# Altium PCB Main ESP32_IoT Gateaway.PcbDoc (part 4 of 4)
Units mm, origin at the board's own origin, x right, y up, seen from the top; angles counter-clockwise.
Board outline 125.73 x 73.66 mm, 4 copper layers (Top Layer, GND, Layer 2, Bottom Layer), stack 0.603 mm thick; 167 components, 121 nets, 681 pads, 324 vias.
Unrouted connection lines stored in the file: 132.
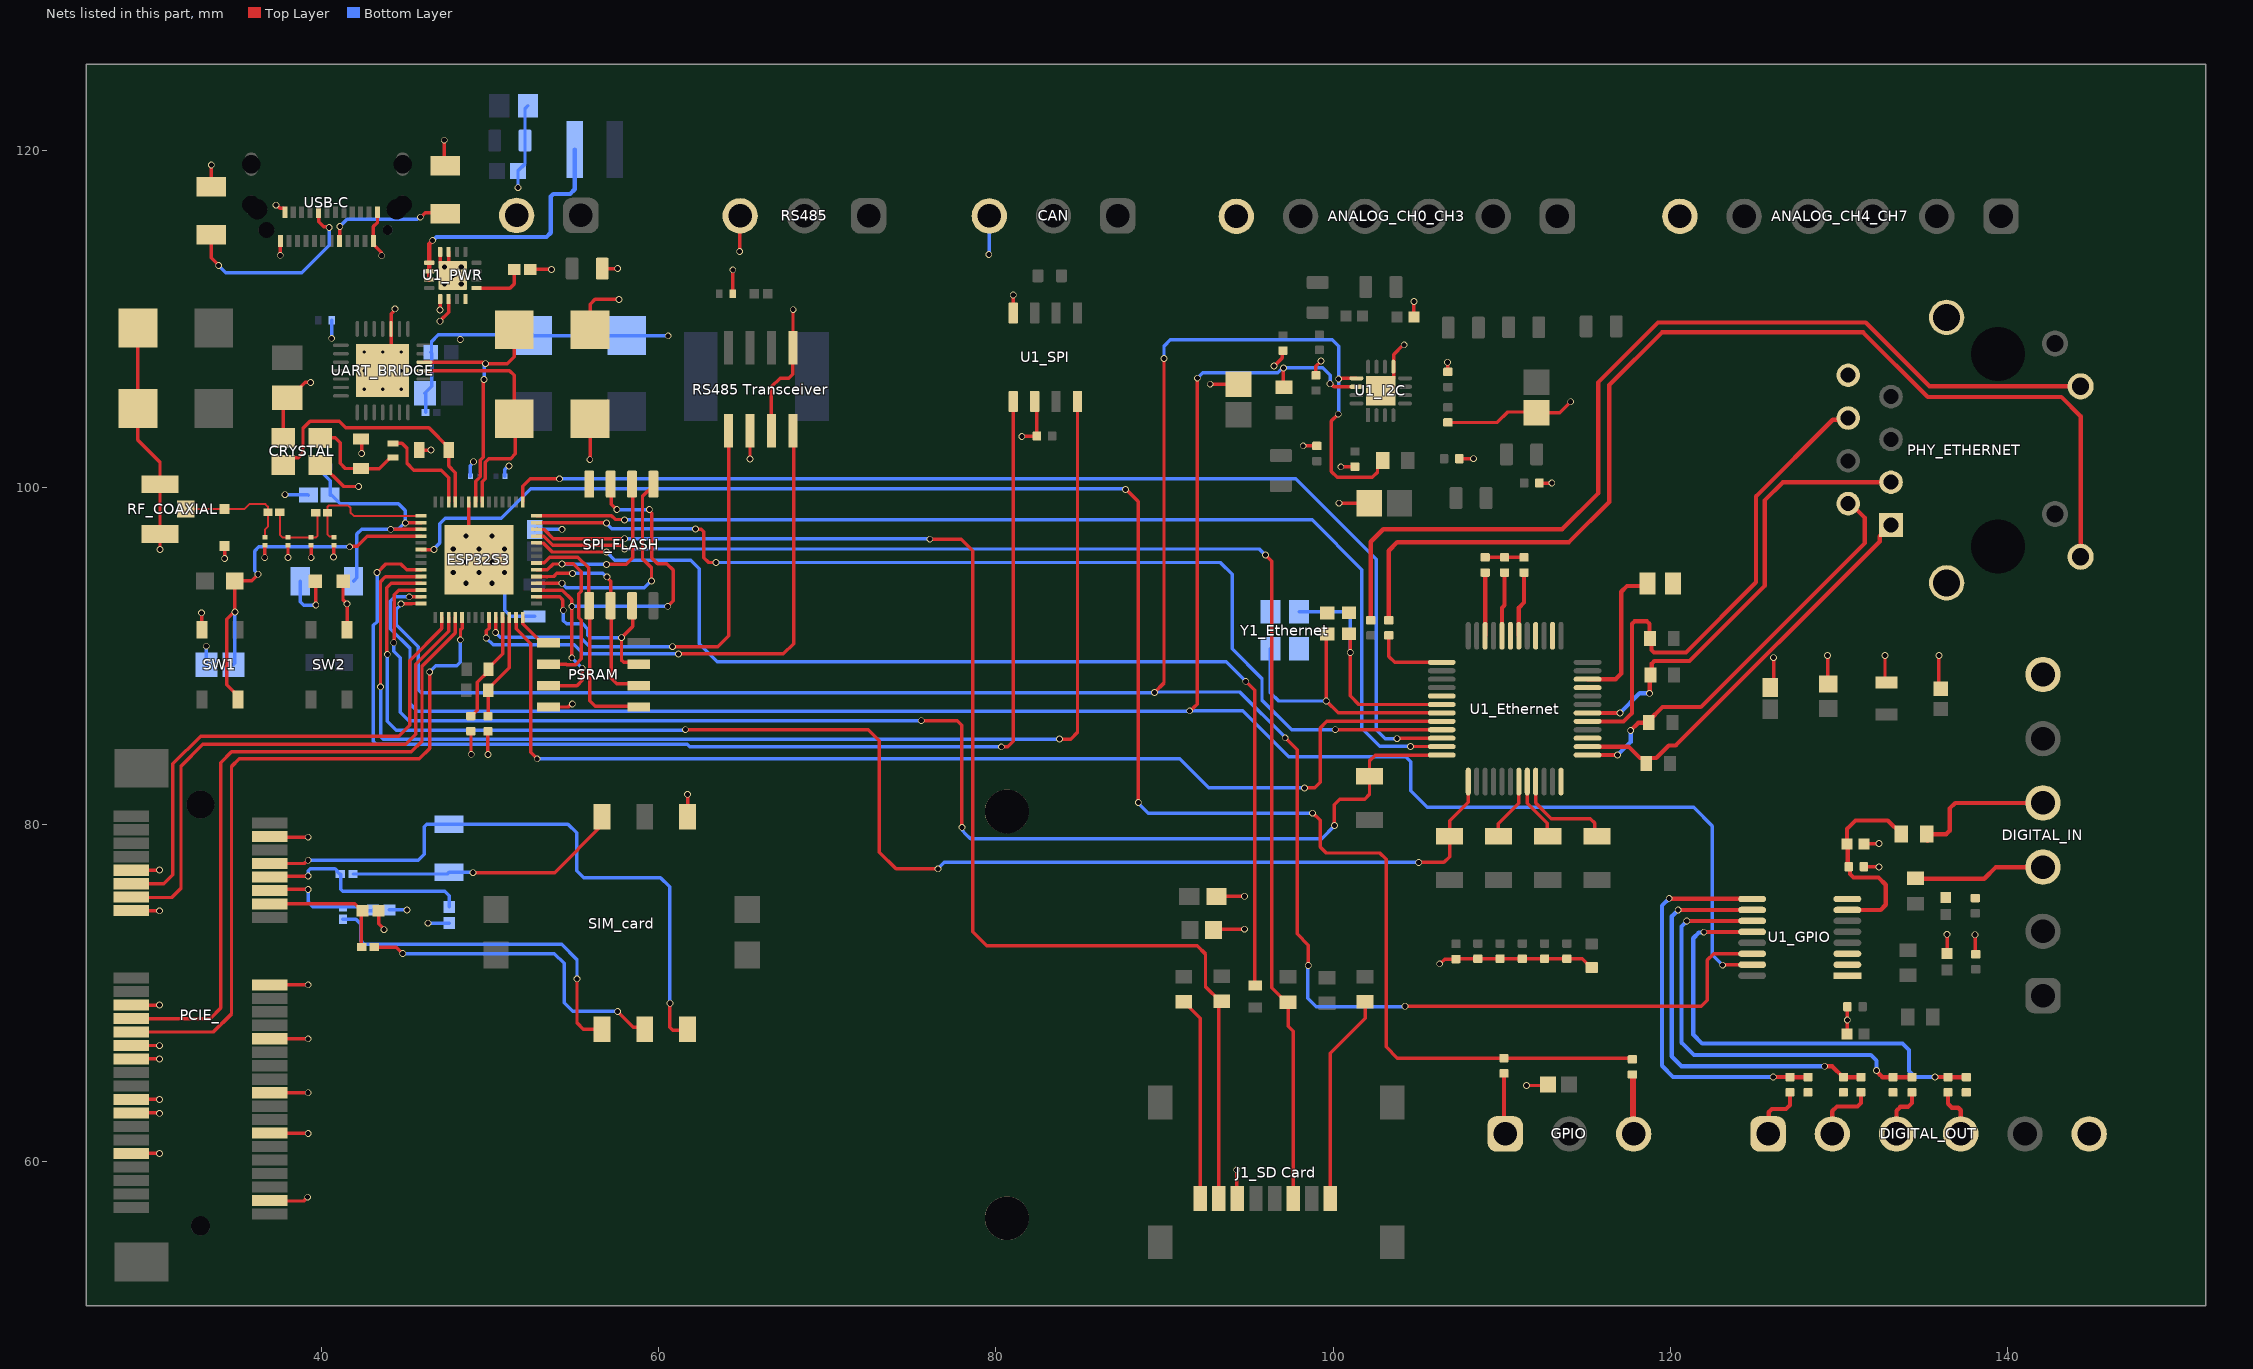
[diagram p5: the nets of this part, all layers, seen from the top]

## Via types
v1: diameter 0.4, hole 0.3, Top Layer to Bottom Layer, 280 vias
v2: diameter 0.5, hole 0.4, Top Layer to Bottom Layer, 18 vias
v3: diameter 0.6, hole 0.3, Top Layer to Bottom Layer, 12 vias
v4: diameter 0.5, hole 0.2, Top Layer to Bottom Layer, 9 vias
v5: diameter 0.5, hole 0.3, Top Layer to Bottom Layer, 5 vias

## Nets (pads, with @x,y where several pads share a name; then routed paths per layer and width w, separated by ;. In a path a pad name is that pad's centre, name@x,y a point inside that pad or via, vN(x,y) a via of type N, cw(c..) or ccw(c..) an arc to the next point about the centre after c; other vN are vias at no path point) (continued)
EXP_DIN3_EXT: DIGITAL_IN.3 R7_GPIO.1 | length 7.9
  Top Layer w0.254: R7_GPIO.1@134.543,76.81 134.569,76.784 138.633,76.784 139.319,77.47 DIGITAL_IN.3@142.113,77.47
EXP_DIN4: C5_GPIO.1 R9_GPIO.2 R10_GPIO.1 U1_GPIO.7 | length 12.5
  Top Layer w0.254: U1_GPIO.7@130.511,74.929 132.486,74.929 132.791,75.235 132.791,76.429 132.359,76.86 130.868,76.86 130.671,77.058 130.671,77.363 130.538,77.495 130.538,78.791 R10_GPIO.1@130.488,78.842 130.488,79.739 130.988,80.239 132.905,80.239 R9_GPIO.2@133.718,79.426
EXP_DIN4_EXT: DIGITAL_IN.4 R9_GPIO.1 | length 8.7
  Top Layer w0.254: R9_GPIO.1@135.218,79.426 136.373,79.426 136.576,79.629 136.576,80.95 136.906,81.28 DIGITAL_IN.4@142.113,81.28 ; R9_GPIO.1@135.262,79.037 R9_GPIO.1@135.414,79.189
EXP_DOUT1: R11_GPIO.1 R12_GPIO.1 U1_GPIO.9 | length 24
  Top Layer w0.254: v1(119.939,75.616) 119.957,75.598 124.842,75.598 U1_GPIO.9@124.86,75.579 ; v1(126.111,65.024) 126.112,65.024 126.118,65.029 126.13,65.017 127.094,65.017 R11_GPIO.1@127.102,65.01 R12_GPIO.1@128.168,65.01
  Bottom Layer w0.254: v1(119.939,75.616) 119.507,75.184 119.507,65.684 120.167,65.024 v1(126.111,65.024)
EXP_DOUT1_EXT: DIGITAL_OUT.1 R11_GPIO.2 | length 3.5
  Top Layer w0.254: DIGITAL_OUT.1@125.806,61.642 125.84,61.676 125.84,62.924 126.032,63.116 126.87,63.116 127.102,63.348 R11_GPIO.2@127.102,64.11
EXP_DOUT2: R13_GPIO.1 R14_GPIO.1 U1_GPIO.10 | length 25
  Top Layer w0.254: v1(120.472,74.93) U1_GPIO.10@124.86,74.929 ; v1(129.162,65.656) 129.605,65.656 130.252,65.01 R14_GPIO.1@130.277,65.01 R13_GPIO.1@131.318,65.01
  Bottom Layer w0.254: v1(120.472,74.93) 120.091,74.549 120.091,66.243 120.675,65.659 129.159,65.659 v1(129.162,65.656)
EXP_DOUT2_EXT: DIGITAL_OUT.2 R13_GPIO.2 | length 3.9
  Top Layer w0.254: DIGITAL_OUT.2@129.616,61.642 129.616,62.992 129.896,63.271 131.115,63.271 131.318,63.475 R13_GPIO.2@131.318,64.11
EXP_DOUT3: R15_GPIO.1 R16_GPIO.1 U1_GPIO.11 | length 26.1
  Top Layer w0.254: v1(120.98,74.27) 121.031,74.27 121.041,74.279 U1_GPIO.11@124.86,74.279 ; v1(132.232,65.405) 132.232,65.365 132.436,65.162 132.436,65.158 132.584,65.01 R16_GPIO.1@133.223,65.01 R15_GPIO.1@134.341,65.01
  Bottom Layer w0.254: v1(120.98,74.27) 120.98,74.251 120.675,73.946 120.675,67.056 121.412,66.319 131.902,66.319 132.232,65.989 v1(132.232,65.405)
EXP_DOUT3_EXT: DIGITAL_OUT.3 R15_GPIO.2 | length 3.1
  Top Layer w0.254: DIGITAL_OUT.3@133.426,61.642 133.426,63.017 133.655,63.246 134.112,63.246 134.341,63.475 R15_GPIO.2@134.341,64.11
EXP_DOUT4: R17_GPIO.1 R18_GPIO.1 U1_GPIO.12 | length 27.4
  Top Layer w0.254: v1(121.996,73.609) 122.006,73.619 124.85,73.619 U1_GPIO.12@124.86,73.629 ; v1(135.712,65.024) 135.719,65.017 136.47,65.017 R17_GPIO.1@136.477,65.01 R18_GPIO.1@137.566,65.01
  Bottom Layer w0.254: v1(121.996,73.609) 121.979,73.592 121.7,73.592 121.361,73.254 121.361,67.539 121.895,67.005 133.782,67.005 134.163,66.624 134.163,65.38 134.518,65.024 v1(135.712,65.024)
EXP_DOUT4_EXT: DIGITAL_OUT.4 R17_GPIO.2 | length 3
  Top Layer w0.254: R17_GPIO.2@136.477,64.11 136.477,63.427 136.709,63.195 137.087,63.195 137.236,63.046 DIGITAL_OUT.4@137.236,61.642
GND: "J1_SD Card.6" "RS485 Transceiver.2" "RS485 Transceiver.3" "RS485 Transceiver.5" ANALOG_CH0_CH3.6 ANALOG_CH4_CH7.6 C1.2 C1_Ethernet.2 C1_GPIO.2 C1_I2C.2 C2.2 C2_CAN.1 C2_Ethernet.1 C2_GPIO.2 C2_I2C.2 C3.2 C3_Ethernet.2 C3_GPIO.2 C3_I2C.2 C4.1 C4_Ethernet.2 C4_GPIO.2 C4_I2C.2 C5.1 C5_Ethernet.1 C5_GPIO.2 C5_I2C.2 C6.1 C6_Ethernet.1 C6_I2C.2 C7.2 C7_Ethernet.1 C7_I2C.2 C7_MAIN_PWR.1 C8.1 C8_Ethernet.1 C8_I2C.2 C8_PWRFLTR.1 C9.2 C9_Ethernet.1 C9_I2C.2 C10.2 C10_Ethernet.1 C10_I2C.2 C11.2 C11_Ethernet.1 C11_I2C.2 C12.2 C13.2 C14.2 C15.2 C16.2 C17.2 C18.2 C19.2 C20.2 C21.2 C22.1 C23.2 C24.2 C_485.2 C_BULK.2 C_USIM.2 C_USIM_CLK.2 C_USIM_RST.2 CAN.3 CAVIN.2 CIN.2 COUT.2 CRYSTAL.2 CRYSTAL.4 CSS.2 D1.2 D2.2 D3.2 D4.2 D5.2 D6.2 D7.2 DIGITAL_IN.6 DIGITAL_OUT.6 ESP32S3.51 ESP32S3.57 GPIO.3 J_PWR.2 pad.3 pad.4 PCIE_.4 PCIE_.9 PCIE_.15 PCIE_.18 PCIE_.21 PCIE_.26 PCIE_.27 PCIE_.29 PCIE_.34 PCIE_.35 PCIE_.37 PCIE_.40 PCIE_.43 PCIE_.50 PHY_ETHERNET.8 PHY_ETHERNET.S1 PHY_ETHERNET.S2 PSRAM.4 PWR_LED.1 R1_TYPEC.2 R2_GPIO.2 R2_TYPEC.2 R3_Ethernet.2 R4_GPIO.2 R6_GPIO.2 R8_GPIO.2 R10_GPIO.2 R12_GPIO.2 R14_GPIO.2 R16_GPIO.2 R18_GPIO.2 R_ADDR_LOW.1 RF_COAXIAL.2 RF_COAXIAL.3 RS485.3 SIM_card.5 SPI_FLASH.4 SW1.2 SW2.4 U1_Ethernet.3 U1_Ethernet.9 U1_Ethernet.14 U1_Ethernet.16 U1_Ethernet.19 U1_Ethernet.29 U1_Ethernet.48 U1_GPIO.1 U1_GPIO.2 U1_GPIO.3 U1_GPIO.8 U1_I2C.9 U1_I2C.17 U1_PWR.5 U1_PWR.6 U1_PWR.8 U1_PWR.15 U1_PWR.16 U1_PWR.17@47.777,112.573 U1_SPI.2 U1_SPI.8 UART_BRIDGE.3 UART_BRIDGE.29 USB-C.A1 USB-C.A12 USB-C.B1 USB-C.B12 Y1_Ethernet.2 Y1_Ethernet.4 | length 202.7
  Top Layer w0.2: U1_PWR.15@47.527,113.973 47.527,112.823 v5(47.777,112.573)
  Top Layer w0.203: PCIE_.43@28.706,60.486 30.344,60.486 v1@30.353,60.477 ; PCIE_.37@28.706,62.886 30.306,62.886 30.328,62.865 v1@30.353,62.865 ; PCIE_.35@28.706,63.686 30.37,63.686 v1(30.378,63.678) ; PCIE_.29@28.706,66.086 28.711,66.091 v1(30.378,66.091) ; PCIE_.27@28.706,66.886 30.345,66.886 v1@30.353,66.878 ; PCIE_.21@28.706,69.286 30.323,69.286 v1@30.328,69.291 ; PCIE_.15@28.706,74.886 30.295,74.886 v1@30.302,74.879 ; PCIE_.9@28.706,77.286 30.169,77.286 30.175,77.292 ; D3.2@29.094,109.449 D4.2@29.094,104.673 29.094,102.809 30.404,101.498 RF_COAXIAL.3@30.404,100.181 RF_COAXIAL.2@30.404,97.231 v1(30.404,96.317) ; v1(32.868,92.558) 32.868,92.532 32.885,92.515 SW1.2@32.885,91.559 ; R1_TYPEC.2@33.452,117.834 v1(33.452,119.126) ; v1(34.239,95.783) D1.2@34.239,96.512 ; v1(36.618,95.825) 36.622,95.83 36.622,96.557 C16.2@36.627,96.562 ; PCIE_.50@36.906,57.686 36.93,57.663 38.943,57.663 v1(39.167,57.887) ; PCIE_.40@36.906,61.686 v1@39.192,61.686 ; PCIE_.34@36.906,64.086 v1@39.192,64.086 ; PCIE_.26@36.906,67.286 v1@39.192,67.286 ; PCIE_.18@36.906,70.486 v1(39.192,70.485) ; PCIE_.4@36.906,79.286 36.944,79.248 v1@39.116,79.248 ; v1(37.287,116.738) 37.34,116.738 37.523,116.555 37.761,116.555 37.81,116.507 USB-C.B1@37.81,116.317 ; v1(37.538,113.763) 37.538,114.595 USB-C.A12@37.56,114.617 ; CRYSTAL.2@37.711,102.933 37.711,105.09 C20.2@37.948,105.327 38.123,105.327 39.019,106.223 v1(39.345,106.223) ; v1(37.998,95.834) C17.2@37.998,96.562 ; v1(39.37,95.825) C18.2@39.37,96.562 ; CRYSTAL.4@39.911,101.333 40.011,101.333 41.294,100.051 v1(42.189,100.051) ; v1(40.703,95.865) 40.703,96.549 C19.2@40.716,96.562 ; PWR_LED.1@41.275,94.45 PWR_LED.1@41.262,94.437 41.262,93.333 v1(41.504,93.091) 41.504,91.567 SW2.4@41.512,91.559 ; C1.2@42.342,102.856 42.367,102.831 v1(42.367,102.006) ; USB-C.B12@43.31,116.317 43.31,115.725 43.06,115.475 43.06,114.417 43.523,113.954 43.523,113.779 v1(43.561,113.741) ; C_USIM_RST.2@43.379,74.879 43.379,74.121 43.688,73.812 v1(43.688,73.762) ; v4(43.612,106.926) 44.112,107.426 UART_BRIDGE.3@44.112,109.401 44.112,110.302 44.346,110.536 v1(44.346,110.59) ; C2.2@45.785,102.21 v1(46.482,102.21) ; v1(47.015,109.855) 47.015,109.88 47.525,110.39 47.525,111.171 U1_PWR.6@47.527,111.173 ; v1(47.019,110.519) 47.023,110.523 47.023,111.169 U1_PWR.5@47.027,111.173 ; U1_PWR.16@47.027,113.973 47.027,113.323 v5(47.277,113.073) ; v1(47.269,120.599) 47.269,119.13 R2_TYPEC.2@47.32,119.079 ; v3(48.565,97.104) 48.727,97.266 ESP32S3.51@48.727,99.132 ; C3.2@48.844,85.533 48.857,85.52 48.857,84.174 v1(48.87,84.161) ; v1(49.86,84.15) C4.1@49.86,85.522 ; CSS.2@52.375,112.928 v1(53.626,112.928) ; PSRAM.4@53.461,86.97 54.633,86.97 54.811,87.147 v1(54.864,87.147) ; v1(55.905,101.642) 55.905,101.668 55.92,101.683 D5.2@55.92,104.064 ; D6.2@55.92,109.347 55.92,110.86 56.21,111.15 v1(57.633,111.15) ; COUT.2@56.643,112.979 v1(57.556,112.979) ; v1(61.697,81.788) 61.697,81.686 61.703,81.68 SIM_card.5@61.703,80.451 ; C_485.2@64.383,111.481 64.383,112.297 64.389,112.303 v1(64.389,112.903) ; v1(64.795,113.995) 64.808,114.008 64.808,116.094 RS485.3@64.821,116.107 ; v1(65.405,101.684) 65.405,103.351 ; 66.675,103.351 66.675,105.96 67.192,106.477 67.716,106.477 67.945,106.705 67.945,108.281 67.958,108.294 67.958,110.528 v1(67.97,110.541) ; U1_SPI.8@81.026,110.346 v1(81.026,111.404) ; v1(81.534,103.022) 81.547,103.035 82.418,103.035 C2_CAN.1@82.43,103.048 82.43,104.962 U1_SPI.2@82.296,105.096 ; v1(92.71,106.121) 94.373,106.121 C2_I2C.2@94.386,106.108 ; C7.2@92.902,73.736 92.953,73.787 v1(94.742,73.787) ; C8.1@93.08,75.717 93.105,75.743 v1(94.742,75.743) ; v1(94.285,59.512) 94.285,57.851 94.326,57.81 ; v1(96.495,107.193) 96.976,107.674 96.976,108.057 C5_I2C.2@97.028,108.11 ; v1(98.222,102.464) 98.229,102.456 C8_I2C.2@99.035,102.456 ; C4_I2C.2@98.984,106.647 98.971,106.66 98.971,107.175 v1(99.289,107.493) ; v1(100.355,99.06) C1_I2C.2@102.135,99.06 ; v1(100.457,101.219) 100.464,101.226 C6_I2C.2@101.295,101.226 ; U1_I2C.17@102.826,105.719 103.588,106.481 103.588,107.881 104.165,108.458 v1(104.216,108.458) ; R_ADDR_LOW.1@104.792,110.109 104.792,110.863 104.8,110.871 v1(104.8,111.023) ; v1(106.324,71.73) 106.611,72.016 C8_PWRFLTR.1@107.29,72.016 107.299,72.025 108.577,72.025 C8_Ethernet.1@108.586,72.034 C11_Ethernet.1@109.906,72.034 C7_Ethernet.1@111.227,72.034 C6_Ethernet.1@112.547,72.034 C9_Ethernet.1@113.867,72.034 114.773,72.034 115.292,71.516 C10_Ethernet.1@115.341,71.516 ; v1(106.782,107.423) 106.794,107.411 106.794,106.863 C11_I2C.2@106.807,106.851 ; C10_I2C.2@106.807,103.85 109.742,103.85 110.363,104.47 112.028,104.47 C3_I2C.2@112.065,104.433 ; C7_I2C.2@107.486,101.702 v1(108.331,101.702) ; C5_Ethernet.1@109.02,95.845 C4_Ethernet.2@110.174,95.845 C3_Ethernet.2@111.328,95.845 ; v1(111.481,64.516) 112.684,64.516 C1_GPIO.2@112.735,64.567 ; C3_I2C.2@112.091,104.433 113.45,104.433 v1(114.097,105.08) ; C9_I2C.2@112.235,100.254 v1(112.979,100.254) ; C6.1@125.933,88.118 126.134,88.318 v1(126.134,89.893) ; v1(129.337,90.018) 129.337,88.38 C5.1@129.388,88.33 ; R4_GPIO.2@130.488,67.564 130.505,67.581 v1(130.505,68.402) 130.509,68.406 130.509,69.186 C2_GPIO.2@130.512,69.19 ; C5_GPIO.2@131.489,77.495 131.501,77.483 132.372,77.483 v1(132.385,77.47) ; R10_GPIO.2@131.488,78.842 131.513,78.867 v1(132.385,78.867) ; v1(132.74,90.018) 132.74,88.519 C9.2@132.842,88.417 ; v1(135.941,90.018) 135.941,88.155 C10.2@136.042,88.053 ; R6_GPIO.2@136.423,72.357 v1(136.423,73.482) ; v1(138.074,73.457) 138.1,73.431 138.1,72.332 C3_GPIO.2@138.125,72.307
  Top Layer w0.35: R2_GPIO.2@117.754,65.165 117.793,65.127 117.793,61.68 GPIO.3@117.831,61.642
  Bottom Layer w0.203: v1(33.147,90.576) 33.16,90.564 C13.2@33.16,89.484 ; v1(37.821,99.568) 39.187,99.568 C7_MAIN_PWR.1@39.212,99.543 ; v1(40.589,108.839) C21.2@40.59,109.911 ; C_USIM_CLK.2@44.01,74.93 v1(45.06,74.93) ; C22.1@46.16,104.451 46.16,105.556 C23.2@46.122,105.594 46.533,106.005 46.533,107.967 C24.2@46.474,108.026 46.513,108.065 46.513,108.641 46.914,109.042 48.216,109.042 ; v1(46.304,74.143) 46.308,74.147 C_USIM.2@47.574,74.147 ; v1(48.216,108.77) 48.216,109.042 ; C14.2@48.814,100.665 48.819,100.67 48.819,101.281 49.002,101.465 v1(49.002,101.518) ; v3(50.851,94.945) 50.851,92.71 51.217,92.344 C12.2@52.629,92.344 ; C15.2@50.868,100.665 50.868,101.058 51.079,101.27 v1(51.105,101.27) ; v1(51.638,117.78) 51.644,117.785 CAVIN.2@51.644,118.77 52.057,119.183 C_BULK.2@52.057,120.574 52.057,122.454 CIN.2@52.234,122.631 ; C11.2@52.629,97.491 52.649,97.511 v1(54.26,97.511) ; v1(60.554,108.991) 60.539,109.006 D7.2@58.09,109.006 D2.2@52.523,109.006 52.487,109.042 48.216,109.042 ; v1(79.578,113.817) 79.591,113.83 79.591,116.091 CAN.3@79.604,116.103
  other v1: 30.378,60.477 39.192,61.671 30.378,62.865 39.192,64.084 30.378,66.878 39.192,67.285 30.378,69.291 30.378,74.879 30.378,77.292 39.192,79.248
  other v3: 48.565,94.31 50.089,94.31 47.803,94.945 49.327,94.945 48.565,95.58 50.089,95.58 47.803,96.342 49.327,96.342 50.851,96.342 50.089,97.104
  other v4: 42.512,105.826 43.612,105.826 44.712,105.826 42.512,106.926 44.712,106.926 42.512,108.026 43.612,108.026 44.712,108.026
  other v5: 47.277,112.073 48.277,112.073 48.277,113.073
GPIO1_EXT: GPIO.1 R1_GPIO.2 | length 3.6
  Top Layer w0.254: R1_GPIO.2@110.134,65.234 110.134,61.718 GPIO.1@110.211,61.642
I2C_SCL: ESP32S3.14 R5_I2C.2 U1_GPIO.14 U1_I2C.13 | length 148.9
  Top Layer w0.203: v1(44.704,93.091) 45.345,93.091 45.361,93.107 ESP32S3.14@45.902,93.107 ; v1(89.408,87.833) 89.967,88.392 v1(89.967,107.645) ; v1(97.155,85.141) 97.866,84.43 97.866,73.508 98.527,72.847 v1(98.527,71.628) ; v1(100.305,104.343) 99.898,103.937 99.898,100.94 100.235,100.602 102.33,100.602 102.634,100.907 102.634,101.302 R5_I2C.2@102.933,101.6 ; v1(100.33,106.426) 100.366,106.462 101.379,106.462 U1_I2C.13@101.386,106.469 ; v1(104.267,69.215) 121.844,69.215 122.199,69.571 122.199,71.958 122.571,72.329 U1_GPIO.14@124.86,72.329
  Bottom Layer w0.203: v1(44.704,93.091) 44.704,93.038 44.425,92.758 44.425,91.846 45.72,90.551 45.72,87.986 45.898,87.808 89.383,87.808 89.433,87.859 94.463,87.859 97.155,85.166 v1(97.155,85.141) ; v1(89.967,107.645) 89.967,108.382 90.348,108.763 99.949,108.763 100.33,108.382 v1(100.33,106.426) 100.33,104.369 v1(100.305,104.343) ; v1(98.527,71.628) 98.501,71.603 98.501,69.698 99.009,69.19 104.216,69.19 104.242,69.215 v1(104.267,69.215)
I2C_SDA: ESP32S3.13 R4_I2C.2 U1_GPIO.15 U1_I2C.14 | length 131.7
  Top Layer w0.203: v1@45.192,93.506 ESP32S3.13@45.901,93.506 ; v1(91.491,86.741) 91.544,86.741 91.801,86.998 91.804,86.998 91.948,87.141 v1(91.948,106.477) ; v1(97.053,107.086) 97.053,105.957 R4_I2C.2@97.079,105.931 ; v1(99.822,106.147) 99.875,106.147 100.053,105.969 U1_I2C.14@101.386,105.969 ; v1(123.114,71.653) 123.14,71.679 U1_GPIO.15@124.86,71.679
  Bottom Layer w0.203: v1(45.191,93.506) 44.331,93.506 44.069,93.243 44.069,91.618 45.237,90.449 45.237,87.147 45.669,86.716 91.465,86.716 v1(91.491,86.741) 94.64,86.741 97.358,84.023 104.318,84.023 104.616,83.725 104.616,81.998 105.588,81.026 121.387,81.026 122.504,79.908 122.504,72.263 v1(123.114,71.653) ; v1(91.948,106.477) 92.262,106.791 96.705,106.791 97,107.086 v1(97.053,107.086) 99.39,107.086 99.822,106.655 v1(99.822,106.147)
LINKLED: R11_Ethernet.2 U1_Ethernet.25 | length 4.5
  Top Layer w0.203: R11_Ethernet.2@103.302,91.219 103.302,89.967 103.651,89.618 U1_Ethernet.25@106.444,89.618
NetC1_1: C1.1 CRYSTAL.1 L1.1 | length 6.1
  Top Layer w0.203: CRYSTAL.1@39.911,102.933 40.805,102.933 41.097,102.641 41.097,101.422 41.402,101.117 42.18,101.117 42.192,101.106 43.418,101.106 44.071,101.759 L1.1@44.221,101.759
NetC1_Ethernet_1: C1_Ethernet.1 U1_Ethernet.30 Y1_Ethernet.1 | length 14.6
  Top Layer w0.203: C1_Ethernet.1@100.94,91.313 101.016,91.237 101.016,87.63 101.528,87.118 U1_Ethernet.30@106.444,87.118
  Bottom Layer w0.203: Y1_Ethernet.1@97.98,92.616 100.678,92.616 101.016,92.278 v1(101.016,90.195)
NetC2_Ethernet_2: C2_Ethernet.2 U1_Ethernet.31 Y1_Ethernet.3 | length 17.3
  Top Layer w0.203: C2_Ethernet.2@99.644,91.298 99.593,91.247 v1(99.593,87.325) 100.301,86.618 U1_Ethernet.31@106.444,86.618
  Bottom Layer w0.203: Y1_Ethernet.3@96.28,90.416 96.28,87.82 96.774,87.325 v1(99.593,87.325)
NetC3_Ethernet_1: C3_Ethernet.1 U1_Ethernet.18 | length 3.9
  Top Layer w0.254: U1_Ethernet.18@111.019,91.193 111.019,92.858 111.328,93.167 C3_Ethernet.1@111.328,94.945
NetC4_Ethernet_1: C4_Ethernet.1 U1_Ethernet.20 | length 3.8
  Top Layer w0.254: U1_Ethernet.20@110.019,91.193 110.019,92.849 110.174,93.004 C4_Ethernet.1@110.174,94.945
NetC5_Ethernet_2: C5_Ethernet.2 U1_Ethernet.22 | length 3.8
  Top Layer w0.254: U1_Ethernet.22@109.019,91.193 C5_Ethernet.2@109.02,94.945
NetC16_1: C16.1 D1.1 L3.1 RF_COAXIAL.1 | length 7
  Top Layer w0.116: RF_COAXIAL.1@31.929,98.706 31.935,98.712 D1.1@34.239,98.712 35.415,98.712 35.712,99.009 36.652,99.009 36.8,98.862 36.8,98.534 L3.1@36.81,98.524 36.81,97.668 36.627,97.485 C16.1@36.627,97.037
NetC17_1: C17.1 C18.1 L3.2 L4.1 | length 5.1
  Top Layer w0.116: L3.2@37.518,98.524 37.518,97.178 37.659,97.037 C17.1@37.998,97.037 C18.1@39.37,97.037 39.658,97.037 39.751,97.13 39.751,98.374 L4.1@39.634,98.491
NetCSS_1: CSS.1 U1_PWR.9 | length 3.2
  Top Layer w0.203: U1_PWR.9@49.177,111.823 51.168,111.823 51.41,112.065 51.41,112.916 CSS.1@51.422,112.928
NetESP32S3_6: ESP32S3.6 R1_GPIO.1 R2_GPIO.1 | length 106
  Top Layer w0.203: ESP32S3.6@45.902,96.307 46.65,96.307 v1(46.66,96.317) ; v1(87.681,99.873) 87.732,99.873 88.443,99.162 v1(88.443,81.305) ; v1(98.781,80.67) 98.806,80.67 99.238,80.239 99.238,78.664 99.593,78.308 102.768,78.308 103.149,77.927 103.149,66.802 103.817,66.134 R1_GPIO.1@110.134,66.134 117.685,66.134 R2_GPIO.1@117.754,66.065
  Bottom Layer w0.203: v1(46.66,96.317) 46.66,96.37 46.99,96.7 46.99,97.841 47.32,98.171 50.648,98.171 52.4,99.924 87.491,99.924 87.504,99.91 87.643,99.91 v1(87.681,99.873) ; v1(88.443,81.305) 88.443,81.255 89.027,80.67 v1(98.781,80.67)
NetESP32S3_9: ESP32S3.9 U1_SPI.1 | length 71.5
  Top Layer w0.203: v1(43.282,94.945) 43.79,95.453 44.698,95.453 45.044,95.107 ESP32S3.9@45.902,95.107 ; v1(80.315,84.607) 80.696,84.607 81.026,84.938 U1_SPI.1@81.026,105.096
  Bottom Layer w0.203: v1(43.282,94.945) 43.282,92.037 43.053,91.808 43.053,84.938 43.236,84.755 61.675,84.755 61.822,84.607 v1(80.315,84.607)
NetESP32S3_10: ESP32S3.10 U1_SPI.4 | length 72.9
  Top Layer w0.203: v1(43.49,88.163) 43.485,88.168 43.485,94.412 43.78,94.707 ESP32S3.10@45.902,94.707 ; v1(83.769,85.065) 84.43,85.065 84.836,85.471 U1_SPI.4@84.836,105.096
  Bottom Layer w0.203: v1(43.49,88.163) 43.51,88.143 43.51,85.192 43.637,85.065 v1(83.769,85.065)
NetESP32S3_11: ESP32S3.11 R1_Ethernet.1 U1_Ethernet.37 | length 85.8
  Top Layer w0.203: v1(43.891,90.094) 43.866,90.119 43.866,94.056 44.117,94.307 ESP32S3.11@45.902,94.307 ; v1(61.57,85.623) 72.415,85.623 73.076,84.963 73.076,78.359 74.066,77.368 v1(76.556,77.368) ; v1(105.08,77.749) 106.578,77.749 106.909,78.08 R1_Ethernet.1@106.909,79.304 106.909,80.213 108.019,81.324 U1_Ethernet.37@108.019,82.543
  Bottom Layer w0.203: v1(43.891,90.094) 43.891,86.131 44.425,85.598 61.544,85.598 v1(61.57,85.623) ; v1(76.556,77.368) 76.937,77.749 v1(105.08,77.749)
NetESP32S3_12: ESP32S3.12 R2_Ethernet.1 U1_Ethernet.36 | length 81.4
  Top Layer w0.203: v1(44.272,90.78) 44.298,90.805 44.298,93.624 44.58,93.907 ESP32S3.12@45.902,93.907 ; v1(75.565,86.157) 77.699,86.157 77.978,85.877 v1(77.978,79.832) ; v1(100.076,79.934) 100.076,81.178 100.393,81.496 101.867,81.496 102.159,81.788 R2_Ethernet.1@102.159,82.86 102.159,83.769 102.508,84.118 U1_Ethernet.36@106.444,84.118
  Bottom Layer w0.203: v1(44.272,90.78) 44.272,90.272 44.653,89.891 44.653,86.665 45.164,86.154 75.562,86.154 v1(75.565,86.157) ; v1(77.978,79.832) 78.016,79.795 78.016,79.621 78.176,79.46 78.49,79.146 99.314,79.146 100.076,79.908 v1(100.076,79.934)
NetESP32S3_16: ESP32S3.16 PCIE_.11 | length 31.4
  Top Layer w0.203: PCIE_.11@28.706,76.486 30.639,76.486 31.166,77.013 31.166,83.591 32.817,85.242 44.577,85.242 45.212,85.877 45.212,89.713 47.127,91.628 ESP32S3.16@47.127,92.282
NetESP32S3_17: ESP32S3.17 PCIE_.13 | length 32.9
  Top Layer w0.203: PCIE_.13@28.706,75.686 28.726,75.667 31.09,75.667 31.648,76.225 31.648,83.464 32.944,84.76 44.983,84.76 45.568,85.344 45.568,89.51 47.527,91.469 ESP32S3.17@47.527,92.282
NetESP32S3_18: ESP32S3.18 PCIE_.23 | length 40.7
  Top Layer w0.203: PCIE_.23@28.706,68.486 33.383,68.486 34.011,69.113 34.011,83.668 34.646,84.303 45.314,84.303 45.949,84.938 45.949,89.383 47.927,91.361 ESP32S3.18@47.927,92.282
NetESP32S3_19: ESP32S3.19 PCIE_.25 | length 42.6
  Top Layer w0.203: PCIE_.25@28.706,67.686 33.574,67.686 34.646,68.758 34.646,83.439 35.103,83.896 45.796,83.896 46.406,84.506 v1(46.406,89.052) ; v1(48.222,90.954) 48.23,90.962 48.23,91.556 48.327,91.652 ESP32S3.19@48.327,92.282
  Bottom Layer w0.203: v1(46.406,89.052) 46.408,89.052 46.764,89.408 48.006,89.408 48.222,89.624 v1(48.222,90.954)
NetESP32S3_23: "RS485 Transceiver.4" ESP32S3.23 | length 32.8
  Top Layer w0.203: v1(49.759,91.059) 49.759,91.484 49.927,91.652 ESP32S3.23@49.927,92.282 ; v1(61.163,90.119) 67.386,90.119 67.996,90.729 67.996,103.301 67.945,103.351
  Bottom Layer w0.203: v1(49.759,91.059) 50.165,90.653 54.991,90.653 55.524,90.119 v1(61.163,90.119)
NetESP32S3_24: "RS485 Transceiver.1" ESP32S3.24 | length 27.5
  Top Layer w0.203: v1(50.317,91.389) 50.317,91.415 50.327,91.424 ESP32S3.24@50.327,92.282 ; v1(60.808,90.551) 63.5,90.551 64.135,91.186 64.135,103.351
  Bottom Layer w0.203: v1(50.317,91.389) 50.597,91.11 55.347,91.11 55.905,90.551 v1(60.808,90.551)
NetESP32S3_27: ESP32S3.27 U1_Ethernet.32 | length 66.8
  Top Layer w0.203: ESP32S3.27@51.527,92.282 51.527,91.602 52.4,90.729 52.4,84.277 v1(52.781,83.896) ; v1(98.298,82.169) 98.908,82.169 99.238,82.499 99.238,85.725 99.631,86.118 U1_Ethernet.32@106.444,86.118
  Bottom Layer w0.203: v1(52.781,83.896) 90.907,83.896 92.634,82.169 v1(98.298,82.169)
NetESP32S3_38: ESP32S3.38 R8.1 | length 66.4
  Top Layer w0.203: ESP32S3.38@52.752,96.707 52.76,96.699 53.139,96.699 53.673,96.164 v1(56.896,96.164) ; v1(94.818,88.494) 95.352,87.96 95.352,70.475 R8.1@95.377,70.449
  Bottom Layer w0.203: v1(56.896,96.164) 57.377,95.683 61.898,95.683 62.408,95.174 62.408,90.721 63.467,89.662 93.65,89.662 v1(94.818,88.494)
NetESP32S3_39: "J1_SD Card.3" ESP32S3.39 R5.1 | length 82.6
  Top Layer w0.203: ESP32S3.39@52.752,97.107 52.76,97.099 53.168,97.099 53.696,96.571 57.734,96.571 v1(57.963,96.342) ; v1(95.987,95.987) 96.368,95.606 96.368,70.321 97.233,69.456 R5.1@97.333,69.456 97.333,68.021 97.626,67.728 97.626,57.81
  Bottom Layer w0.203: v1(57.963,96.342) 95.628,96.342 95.984,95.987 v1(95.987,95.987)
NetESP32S3_40: "J1_SD Card.7" ESP32S3.40 R7.2 | length 78.4
  Top Layer w0.203: ESP32S3.40@52.752,97.507 52.76,97.499 53.196,97.499 53.743,96.952 v1(57.963,96.952) ; v1(76.073,96.926) 77.927,96.926 78.613,96.241 78.613,73.635 79.451,72.796 91.948,72.796 92.431,72.314 92.431,70.372 93.296,69.506 R7.2@93.396,69.506 93.226,69.336 93.226,57.81
  Bottom Layer w0.203: v1(57.963,96.952) 57.975,96.939 76.06,96.939 v1(76.073,96.926)
NetESP32S3_41: ESP32S3.41 U1_Ethernet.33 | length 63
  Top Layer w0.203: ESP32S3.41@52.752,97.907 53.453,97.907 53.458,97.912 56.825,97.912 v1@56.845,97.892 ; v1(62.179,97.536) 62.205,97.511 62.509,97.511 62.662,97.358 62.662,95.834 62.955,95.541 v1(63.386,95.541) ; v1(100.127,85.623) 100.132,85.618 U1_Ethernet.33@106.444,85.618
  Bottom Layer w0.203: v1@56.845,97.892 56.848,97.892 57.203,97.536 v1(62.179,97.536) ; v1(63.386,95.541) 93.308,95.541 94.005,94.844 94.005,90.424 95.783,88.646 95.783,87.376 97.536,85.623 v1(100.127,85.623)
  other v1: 56.896,97.892
NetESP32S3_42: ESP32S3.42 U1_Ethernet.35 | length 64.9
  Top Layer w0.203: ESP32S3.42@52.752,98.307 57.192,98.307 57.404,98.095 57.937,98.095 v1(57.963,98.069) ; v1(104.597,84.633) 104.605,84.625 106.437,84.625 U1_Ethernet.35@106.444,84.618
  Bottom Layer w0.203: v1(57.963,98.069) 98.755,98.069 101.702,95.123 101.702,85.7 102.768,84.633 v1(104.597,84.633)
NetESP32S3_43: ESP32S3.43 U1_Ethernet.34 | length 68
  Top Layer w0.203: ESP32S3.43@51.927,99.132 51.927,100.06 52.375,100.508 v1(54.102,100.508) ; v1(103.784,85.09) 103.798,85.104 106.43,85.104 U1_Ethernet.34@106.444,85.118
  Bottom Layer w0.203: v1(54.102,100.508) 97.79,100.508 102.565,95.733 102.565,85.623 103.099,85.09 v1(103.784,85.09)
NetJ1_Ethernet_9: PHY_ETHERNET.9 R11_Ethernet.1 | length 65
  Top Layer w0.254: R11_Ethernet.1@103.302,92.119 103.302,96.241 103.81,96.749 113.995,96.749 116.383,99.136 116.383,106.07 119.507,109.195 131.445,109.195 135.28,105.359 143.205,105.359 144.348,104.216 PHY_ETHERNET.9@144.348,95.884
NetJ1_Ethernet_11: PHY_ETHERNET.11 R12_Ethernet.1 | length 57.6
  Top Layer w0.254: R12_Ethernet.1@102.235,92.119 102.235,96.774 102.972,97.511 113.589,97.511 115.722,99.644 115.722,106.223 119.278,109.779 131.597,109.779 135.382,105.994 PHY_ETHERNET.11@144.348,105.994
"NetJ1_SD Card_1": "J1_SD Card.1" R3.2 | length 12.5
  Top Layer w0.203: 99.826,57.81 99.826,66.425 101.898,68.497 R3.2@101.898,69.47
"NetJ1_SD Card_8": "J1_SD Card.8" R6.2 | length 12.1
  Top Layer w0.203: R6.2@91.142,69.478 92.126,68.494 92.126,57.81
NetPWR_LED_2: PWR_LED.2 R_PWR.2 | length 3.7
  Top Layer w0.203: PWR_LED.2@39.612,94.437 39.649,94.4 v1(39.649,93.015)
  Bottom Layer w0.203: R_PWR.2@38.735,94.437 38.735,93.218 38.938,93.015 v1(39.649,93.015)
NetR1_TYPEC_1: R1_TYPEC.1 USB-C.B5 | length 11.8
  Top Layer w0.203: R1_TYPEC.1@33.452,114.982 33.452,113.614 33.884,113.182 v1(33.884,113.157) ; USB-C.B5@39.81,116.317 39.81,115.765 40.116,115.459 40.405,115.459 v1(40.442,115.421)
  Bottom Layer w0.203: v1(33.884,113.157) 34.315,112.725 38.809,112.725 40.437,114.353 40.437,115.416 v1(40.442,115.421)
NetR2_TYPEC_1: R2_TYPEC.1 USB-C.A5 | length 7.5
  Top Layer w0.203: USB-C.A5@41.06,114.617 41.066,114.623 41.066,115.462 v1(41.072,115.468) ; v1(45.847,116.027) 45.882,116.027 46.136,116.281 47.266,116.281 R2_TYPEC.1@47.32,116.227
  Bottom Layer w0.203: v1(41.072,115.468) 41.072,115.474 41.498,115.9 43.79,115.9 ; 43.791,115.899 45.666,115.899 45.794,116.027 v1(45.847,116.027)
NetR3_Ethernet_1: R3_Ethernet.1 U1_Ethernet.10 | length 8.7
  Top Layer w0.254: U1_Ethernet.10@115.094,88.618 116.761,88.618 117.094,88.951 117.094,93.802 117.436,94.144 118.514,94.144 R3_Ethernet.1@118.654,94.285
NetR4_Ethernet_2: R4_Ethernet.2 U1_Ethernet.45 | length 6.1
  Top Layer w0.203: U1_Ethernet.45@112.019,82.543 112.019,81.275 112.954,80.34 115.265,80.34 115.519,80.086 115.519,79.431 R4_Ethernet.2@115.646,79.304
NetR5_Ethernet_2: R5_Ethernet.2 U1_Ethernet.44 | length 3.7
  Top Layer w0.203: U1_Ethernet.44@111.519,82.543 111.519,81.267 112.716,80.07 112.716,79.322 R5_Ethernet.2@112.734,79.304
NetR6_Ethernet_2: R6_Ethernet.2 U1_Ethernet.43 | length 3.7
  Top Layer w0.203: R6_Ethernet.2@109.821,79.304 109.804,79.321 109.804,80.035 111.015,81.246 111.015,82.539 U1_Ethernet.43@111.019,82.543
NetR_SIM_CLK_2: R_SIM_CLK.2 SIM_card.2 | length 19.4
  Top Layer w0.203: R_SIM_CLK.2@43.124,72.72 44.425,72.72 v1(44.806,72.339) ; v1(57.556,68.91) 57.556,68.885 58.477,67.964 59.05,67.964 SIM_card.2@59.163,67.851
  Bottom Layer w0.203: v1(44.806,72.339) 53.797,72.339 54.381,71.755 54.381,69.418 54.889,68.91 v1(57.556,68.91)
NetR_SIM_PU_1: R_SIM_PU.1 RSIM.1 SIM_card.7 | length 16.2
  Top Layer w0.203: v1(48.977,77.14) 53.811,77.14 56.623,79.951 SIM_card.7@56.623,80.201
  Bottom Layer w0.203: RSIM.1@41.854,77.064 47.452,77.064 R_SIM_PU.1@47.549,77.16 48.957,77.16 v1(48.977,77.14)
NetR_SIM_RST_2: R_SIM_RST.2 SIM_card.3 | length 20.9
  Top Layer w0.203: v1(55.143,70.841) 55.143,68.224 55.516,67.851 SIM_card.3@56.623,67.851
  Bottom Layer w0.203: R_SIM_RST.2@41.25,74.376 42.032,74.376 42.3,74.108 42.3,73.118 42.52,72.898 54.229,72.898 55.143,71.984 v1(55.143,70.841)
RESET: C13.1 ESP32S3.4 R_RST.2 SW1.3 | length 23.9
  Top Layer w0.203: SW1.3@35.035,87.409 35.035,87.609 34.366,88.278 34.366,92.167 34.807,92.608 v1(34.849,92.608) 34.849,92.659 34.837,92.671 R_RST.2@34.837,94.437 34.862,94.463 35.839,94.463 v1(36.22,94.844) ; v1(41.656,96.469) 41.694,96.507 42.1,96.507 42.7,97.107 ESP32S3.4@45.902,97.107
  Bottom Layer w0.203: C13.1@34.76,89.484 34.849,89.573 v1(34.849,92.608) ; v1(36.22,94.844) 36.22,94.869 36.028,95.061 36.028,96.226 36.271,96.469 v1(41.656,96.469)
RF_LNA: C19.1 ESP32S3.1 L4.2 | length 8.1
  Top Layer w0.116: C19.1@40.716,97.037 40.678,97.075 40.466,97.075 40.343,97.198 L4.2@40.343,98.491 40.343,98.865 40.411,98.933 41.556,98.933 41.707,98.782 41.707,98.501 41.901,98.307 ESP32S3.1@45.902,98.307
RX_N: PHY_ETHERNET.6 R10_Ethernet.1 U1_Ethernet.5 | length 31.3
  Top Layer w0.254: U1_Ethernet.5@115.094,86.118 115.102,86.11 116.311,86.11 116.315,86.106 117.228,86.106 117.727,86.605 117.727,91.901 117.876,92.05 118.625,92.05 118.774,91.901 118.774,91.067 R10_Ethernet.1@118.807,91.034 ; R10_Ethernet.1@118.807,90.934 118.887,90.854 118.887,90.357 119.036,90.208 120.936,90.208 125.095,94.367 125.095,99.466 129.64,104.012 130.456,104.012 PHY_ETHERNET.6@130.558,104.114
RX_P: PHY_ETHERNET.3 R9_Ethernet.2 U1_Ethernet.6 | length 27
  Top Layer w0.254: U1_Ethernet.6@115.384,86.614 115.388,86.618 116.521,86.618 116.525,86.614 v1(117.018,86.614) ; v1(118.77,87.782) 118.779,87.791 118.779,88.821 R9_Ethernet.2@118.832,88.875 ; R9_Ethernet.2@118.832,89.185 118.9,89.185 118.912,89.198 118.912,89.551 119.061,89.7 121.147,89.7 125.603,94.156 125.603,99.225 126.682,100.304 PHY_ETHERNET.3@133.098,100.304
  Bottom Layer w0.254: v1(117.018,86.614) 118.186,87.782 v1(118.77,87.782)
RXD0: D6.1 ESP32S3.50 UART_BRIDGE.26 | length 15.6
  Top Layer w0.2: ESP32S3.50@49.127,99.132 49.127,100.362 49.402,100.637 49.402,101.617 49.577,101.792 49.577,106.205 49.593,106.221 49.593,106.362 v1(49.632,106.401)
  Top Layer w0.203: UART_BRIDGE.26@46.087,107.426 49.569,107.426 49.655,107.34 51.003,107.34 51.42,107.757 D6.1@51.42,109.347
  Bottom Layer w0.203: v1(49.632,106.401) 49.632,107.211 49.708,107.287 v1(49.708,107.34)
SPICLK: ESP32S3.33 PSRAM.6 SPI_FLASH.6 | length 12.3
  Top Layer w0.203: ESP32S3.33@52.752,94.707 53.382,94.707 53.386,94.712 53.758,94.712 53.94,94.894 v1(54.88,94.894) ; v1(56.921,94.691) 56.921,94.638 57.137,94.422 57.137,93.017 57.175,92.979 57.175,88.671 57.506,88.341 58.706,88.341 PSRAM.6@58.807,88.24
  Bottom Layer w0.203: v1(54.88,94.894) 56.665,94.894 56.868,94.691 v1(56.921,94.691)
SPICS0: ESP32S3.32 SPI_FLASH.1 | length 13.3
  Top Layer w0.203: ESP32S3.32@52.752,94.307 52.753,94.309 53.654,94.309 53.655,94.31 v1(54.26,94.31) ; v1(59.563,94.437) 59.563,95.225 59.03,95.758 59.03,99.465 SPI_FLASH.1@59.715,100.15
  Bottom Layer w0.203: v1(54.26,94.31) 54.514,94.056 59.129,94.056 59.51,94.437 v1(59.563,94.437)
SPICS1: ESP32S3.28 PSRAM.1 | length 2.4
  Top Layer w0.203: ESP32S3.28@51.927,92.282 51.935,92.274 51.935,91.905 53.061,90.78 PSRAM.1@53.461,90.78
SPID: ESP32S3.35 PSRAM.5 SPI_FLASH.5 | length 14.4
  Top Layer w0.203: ESP32S3.35@52.752,95.507 52.76,95.516 53.199,95.516 53.538,95.855 55.199,95.855 55.829,95.225 55.829,93.017 55.905,92.94 55.905,87.351 56.236,87.02 58.757,87.02 PSRAM.5@58.807,86.97
SPIHD: ESP32S3.30 PSRAM.7 SPI_FLASH.7 | length 11.6
  Top Layer w0.203: ESP32S3.30@52.752,93.507 54.118,93.507 54.308,93.316 54.308,92.735 v1(54.334,92.71) ; v1(57.785,91.084) 58.445,91.745 SPI_FLASH.7@58.445,92.94 ; v1@57.785,91.11 57.785,89.738 57.904,89.619 58.698,89.619 PSRAM.7@58.807,89.51
  Bottom Layer w0.203: v1(54.334,92.71) 54.334,92.097 54.534,91.897 55.474,91.897 55.778,91.592 55.778,91.237 55.931,91.084 v1(57.785,91.084)
SPIQ: ESP32S3.34 PSRAM.2 SPI_FLASH.2 | length 19.1
  Top Layer w0.203: ESP32S3.34@52.753,95.108 53.384,95.108 53.729,95.453 v1(54.26,95.453) ; PSRAM.2@53.461,89.51 54.508,89.51 54.536,89.482 55.057,89.482 55.397,89.823 55.397,92.111 55.245,92.263 55.245,93.694 55.397,93.846 55.397,94.996 54.915,95.479 v1@54.26,95.479 ; v1(56.896,95.428) 58.064,95.428 58.42,95.783 58.42,95.834 58.445,95.86 SPI_FLASH.2@58.445,100.15
  Bottom Layer w0.203: v1(54.26,95.453) 54.273,95.441 56.883,95.441 v1(56.896,95.428)
SPIWP: ESP32S3.31 PSRAM.3 SPI_FLASH.3 | length 25.5
  Top Layer w0.203: ESP32S3.31@52.752,93.907 54.276,93.907 54.839,93.345 v1(54.839,89.884) ; PSRAM.3@53.461,88.24 55.143,88.24 55.448,88.544 v1(55.448,89.274) ; SPI_FLASH.3@57.175,100.15 57.175,99.009 v1(57.506,98.679) ; v1(59.436,98.679) 59.436,98.626 59.588,98.473 59.588,95.809 59.919,95.479 60.477,95.479 60.858,95.098 60.858,93.271 60.528,92.941 v1(60.528,92.939)
  Bottom Layer w0.203: v1(54.839,89.884) v1(55.448,89.274) ; v1(54.839,92.939) v1(60.528,92.939) ; v1(57.506,98.679) v1(59.436,98.679)
SW_NODE: "L1_Power Reg.1" U1_PWR.1 U1_PWR.2 U1_PWR.3 | length 15.7
  Top Layer w0.254: U1_PWR.3@46.377,112.323 U1_PWR.2@46.377,112.823 U1_PWR.1@46.377,113.323 46.377,114.435 46.584,114.641 v1(46.584,114.656)
  Bottom Layer w0.254: v1(46.584,114.656) 46.606,114.656 46.805,114.855 53.335,114.855 53.584,115.104 53.584,117.261 53.733,117.409 54.737,117.409 55.009,117.681 55.009,120.04
TX_N: PHY_ETHERNET.2 R8_Ethernet.2 U1_Ethernet.1 | length 24.9
  Top Layer w0.254: U1_Ethernet.1@115.094,84.118 v1(116.872,84.118) ; v1(117.653,85.573) 118.11,86.03 118.705,86.03 R8_Ethernet.2@118.731,86.055 118.731,86.155 119.545,86.97 121.818,86.97 131.549,96.7 131.549,98.188 130.703,99.034 PHY_ETHERNET.2@130.558,99.034
  Bottom Layer w0.254: v1(116.872,84.118) 117.653,84.899 v1(117.653,85.573) ; PHY_ETHERNET.2@130.557,99.033 PHY_ETHERNET.2@130.558,99.034
TX_P: PHY_ETHERNET.1 R7_Ethernet.1 U1_Ethernet.2 | length 24.5
  Top Layer w0.254: U1_Ethernet.2@115.094,84.618 117.528,84.618 118.207,83.94 118.355,83.94 R7_Ethernet.1@118.578,83.717 ; R7_Ethernet.1@118.578,83.617 R7_Ethernet.1@118.578,83.717 ; PHY_ETHERNET.1@133.098,97.764 132.43,97.096 132.43,96.794 120.32,84.684 119.913,84.684 119.17,83.94 118.801,83.94 R7_Ethernet.1@118.578,83.717
TXD0: D5.1 ESP32S3.49 UART_BRIDGE.25 | length 14.6
  Top Layer w0.2: UART_BRIDGE.25@46.087,106.926 51.138,106.926 51.42,106.644 D5.1@51.42,104.064 51.486,103.998 51.486,101.981 51.206,101.702 49.911,101.702 49.702,101.493 49.702,100.513 49.527,100.337 ESP32S3.49@49.527,99.132
USB_N: C3.1 ESP32S3.25 R3_USB.2 | length 6.5
  Top Layer w0.203: C3.1@48.844,86.433 48.869,86.433 49.225,86.789 49.225,88.429 49.901,89.105 R3_USB.2@49.901,89.205 ; R3_USB.2@49.901,89.305 50.727,90.131 ESP32S3.25@50.727,92.282
USB_P: C4.2 ESP32S3.26 R2_USB.2 | length 6.3
  Top Layer w0.203: C4.2@49.86,86.422 49.868,86.429 49.868,87.953 R2_USB.2@49.875,87.96 ; R2_USB.2@49.875,88.06 51.113,89.298 51.113,91.441 51.113,91.977 51.118,91.982 ESP32S3.26@51.118,92.268
USIM_CLK: C_USIM_CLK.1 PCIE_.12 R_SIM_RST.1 | length 7.2
  Top Layer w0.203: PCIE_.12@36.906,76.086 36.969,76.149 v1(39.192,76.149)
  Bottom Layer w0.203: v1(39.192,76.149) 39.192,75.413 39.476,75.128 R_SIM_RST.1@41.25,75.128 42.194,75.128 42.443,74.879 43.002,74.879 C_USIM_CLK.1@43.053,74.93
USIM_DATA: C_USIM.1 PCIE_.10 RSIM.2 | length 12.8
  Top Layer w0.203: PCIE_.10@36.906,76.886 36.957,76.937 v1@39.116,76.937
  Bottom Layer w0.203: v1(39.192,76.937) 39.194,76.938 39.194,77.243 39.328,77.377 40.788,77.377 40.924,77.242 40.924,77.198 41.058,77.064 RSIM.2@41.102,77.064 41.123,77.043 41.123,76.167 41.242,76.048 47.295,76.048 47.574,75.768 C_USIM.1@47.574,75.104
USIM_RST: C_USIM_RST.1 PCIE_.14 R_SIM_CLK.1 | length 7.9
  Top Layer w0.203: PCIE_.14@36.906,75.286 41.964,75.286 42.137,75.114 42.187,75.114 C_USIM_RST.1@42.422,74.879 42.347,74.804 R_SIM_CLK.1@42.347,72.695
USIM_VDD: PCIE_.8 R_SIM_PU.2 SIM_card.1 | length 38.1
  Top Layer w0.203: PCIE_.8@36.906,77.686 38.975,77.686 39.165,77.876 v1(39.192,77.876) ; v1(60.655,69.393) 60.655,67.97 60.833,67.793 61.512,67.793 SIM_card.1@61.703,67.601
  Bottom Layer w0.203: v1@39.167,77.876 45.72,77.876 46.076,78.232 46.076,79.858 46.228,80.01 R_SIM_PU.2@47.549,80.01 54.61,80.01 55.118,79.502 55.118,77.267 55.55,76.835 60.096,76.835 60.637,76.295 60.637,69.411 v1(60.655,69.393)
VDD3P3: C7_MAIN_PWR.2 ESP32S3.2 ESP32S3.3 L2.2 R_PWR.1 | length 16.3
  Top Layer w0.203: v1(44.094,97.511) 44.096,97.509 45.9,97.509 ESP32S3.3@45.902,97.507 ; v1(44.958,97.892) 44.974,97.907 ESP32S3.2@45.902,97.907
  Bottom Layer w0.203: L2.2@39.928,101.219 40.009,101.138 40.009,100.885 40.493,100.401 C7_MAIN_PWR.2@40.493,99.543 40.603,99.543 41.111,99.035 44.552,99.035 44.958,98.628 v1(44.958,97.892) 44.931,97.892 44.55,97.511 v1(44.094,97.511) 42.367,97.511 42.088,97.231 42.088,94.64 R_PWR.1@41.885,94.437
XTAL_N: C2.1 CRYSTAL.3 ESP32S3.53 | length 15.8
  Top Layer w0.203: CRYSTAL.3@37.711,101.333 38.145,101.767 38.597,101.767 38.887,102.057 38.887,103.495 39.304,103.911 41.046,103.911 41.427,103.53 46.364,103.53 47.535,102.36 47.535,101.268 47.927,100.876 ESP32S3.53@47.927,99.132
XTAL_P: ESP32S3.54 L1.2 | length 6.1
  Top Layer w0.203: L1.2@44.221,102.609 44.762,102.609 45.06,102.311 45.06,101.422 45.466,101.016 47.092,101.016 47.527,100.581 ESP32S3.54@47.527,99.132
pads on no net: "J1_SD Card.Shell" ESP32S3.8 ESP32S3.21 ESP32S3.22 ESP32S3.36 ESP32S3.37 ESP32S3.44 ESP32S3.45 ESP32S3.47 ESP32S3.48 ESP32S3.52 PCIE_. PCIE_.1 PCIE_.3 PCIE_.5 PCIE_.6 PCIE_.7 PCIE_.16 PCIE_.17 PCIE_.19 PCIE_.20 PCIE_.22 PCIE_.24 PCIE_.28 PCIE_.30 PCIE_.31 PCIE_.32 PCIE_.33 PCIE_.42 PCIE_.44 PCIE_.45 PCIE_.46 PCIE_.47 PCIE_.48 PCIE_.49 PCIE_.51 PCIE_.53 PCIE_.54 PHY_ETHERNET.7 PHY_ETHERNET.MH1 PHY_ETHERNET.MH2 SIM_card.6 SIM_card.Shell SW1.1 SW1.4 SW2.2 SW2.3 U1_Ethernet.7 U1_Ethernet.12 U1_Ethernet.13 U1_Ethernet.23 U1_Ethernet.24 U1_Ethernet.26 U1_Ethernet.38 U1_Ethernet.39 U1_Ethernet.40 U1_Ethernet.41 U1_Ethernet.42 U1_Ethernet.46 U1_Ethernet.47 U1_GPIO.13 U1_PWR.4 U1_PWR.17@47.777,112.573 U1_SPI.5 UART_BRIDGE.1 UART_BRIDGE.2 UART_BRIDGE.9 UART_BRIDGE.10 UART_BRIDGE.11 UART_BRIDGE.12 UART_BRIDGE.13 UART_BRIDGE.14 UART_BRIDGE.15 UART_BRIDGE.16 UART_BRIDGE.17 UART_BRIDGE.18 UART_BRIDGE.19 UART_BRIDGE.20 UART_BRIDGE.21 UART_BRIDGE.22 UART_BRIDGE.23 UART_BRIDGE.24 UART_BRIDGE.27 UART_BRIDGE.28 USB-C. USB-C.1 USB-C.2 USB-C.3 USB-C.4 USB-C.A2 USB-C.A3 USB-C.A8 USB-C.A10 USB-C.A11 USB-C.B2 USB-C.B3 USB-C.B6 USB-C.B7 USB-C.B8 USB-C.B10 USB-C.B11

## Polygon pours and split planes (outlines as drawn)
GND on Bottom Layer "GND_L04_P003" (solid, remove dead copper, pour order 3): 26.035,125.222 26.162,125.095 151.765,125.095 151.765,51.435 26.035,51.435
GND on Layer 2 "GND_L03_P002" (solid, remove dead copper, pour order 2): 26.035,125.095 151.765,125.095 151.765,51.435 26.035,51.435
GND on GND "GND_L02_P001" (solid, remove dead copper, pour order 1): 26.035,125.095 151.765,125.095 151.765,51.562 26.035,51.562
GND on Top Layer "GND_L01_P000" (solid, remove dead copper, pour order 0): 26.06,125.146 26.137,125.07 151.765,125.07 151.765,51.435 26.035,51.435

## Silkscreen, mask and mechanical layers (free items; w line width, h text height)
Top Overlay:
  lines w0.152: 38.033,53.548 83.439,53.548 83.439,83.82 38.033,83.82

## Text inside footprints (layer, text, board x,y; h text height)
PSRAM: Top 3D Body "*" at 54.204,90.03 h1.27